# Altium PCB mini_backplane.PcbDoc (part 1 of 3)
Units mil, origin at the board's own origin, x right, y up, seen from the top; angles counter-clockwise.
Board outline 11387.22 x 6068.2 mil, 4 copper layers (Top Layer, POWER, GND, Bottom Layer); 147 components, 166 nets, 1018 pads, 501 vias.
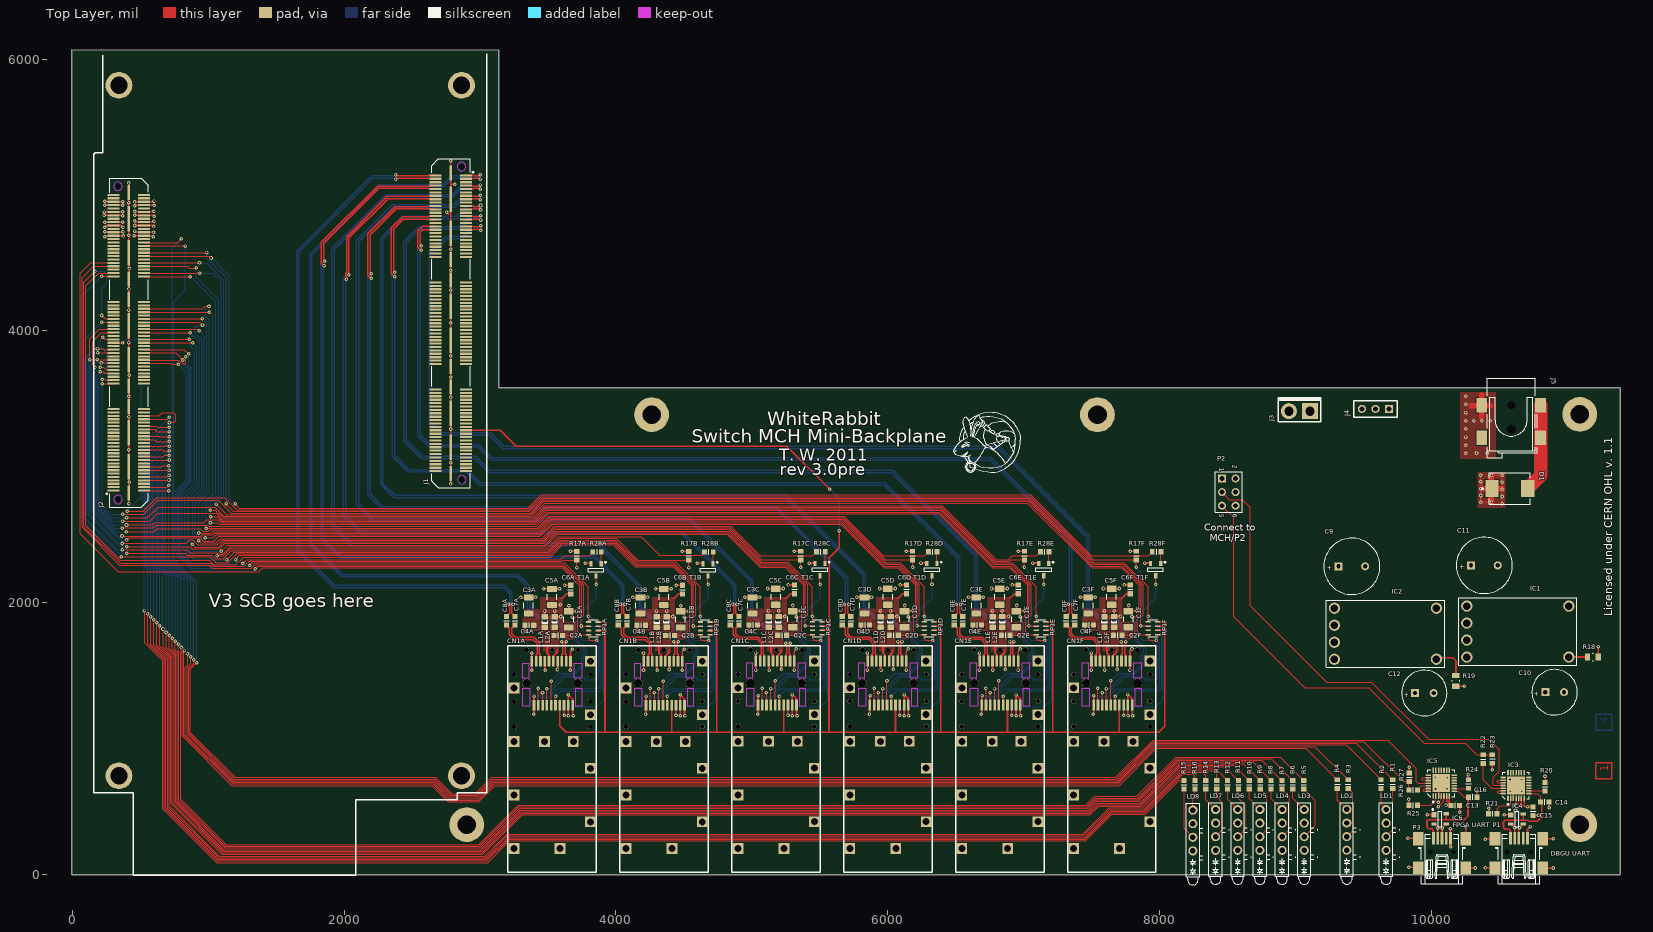
[diagram p0: Top Layer view]
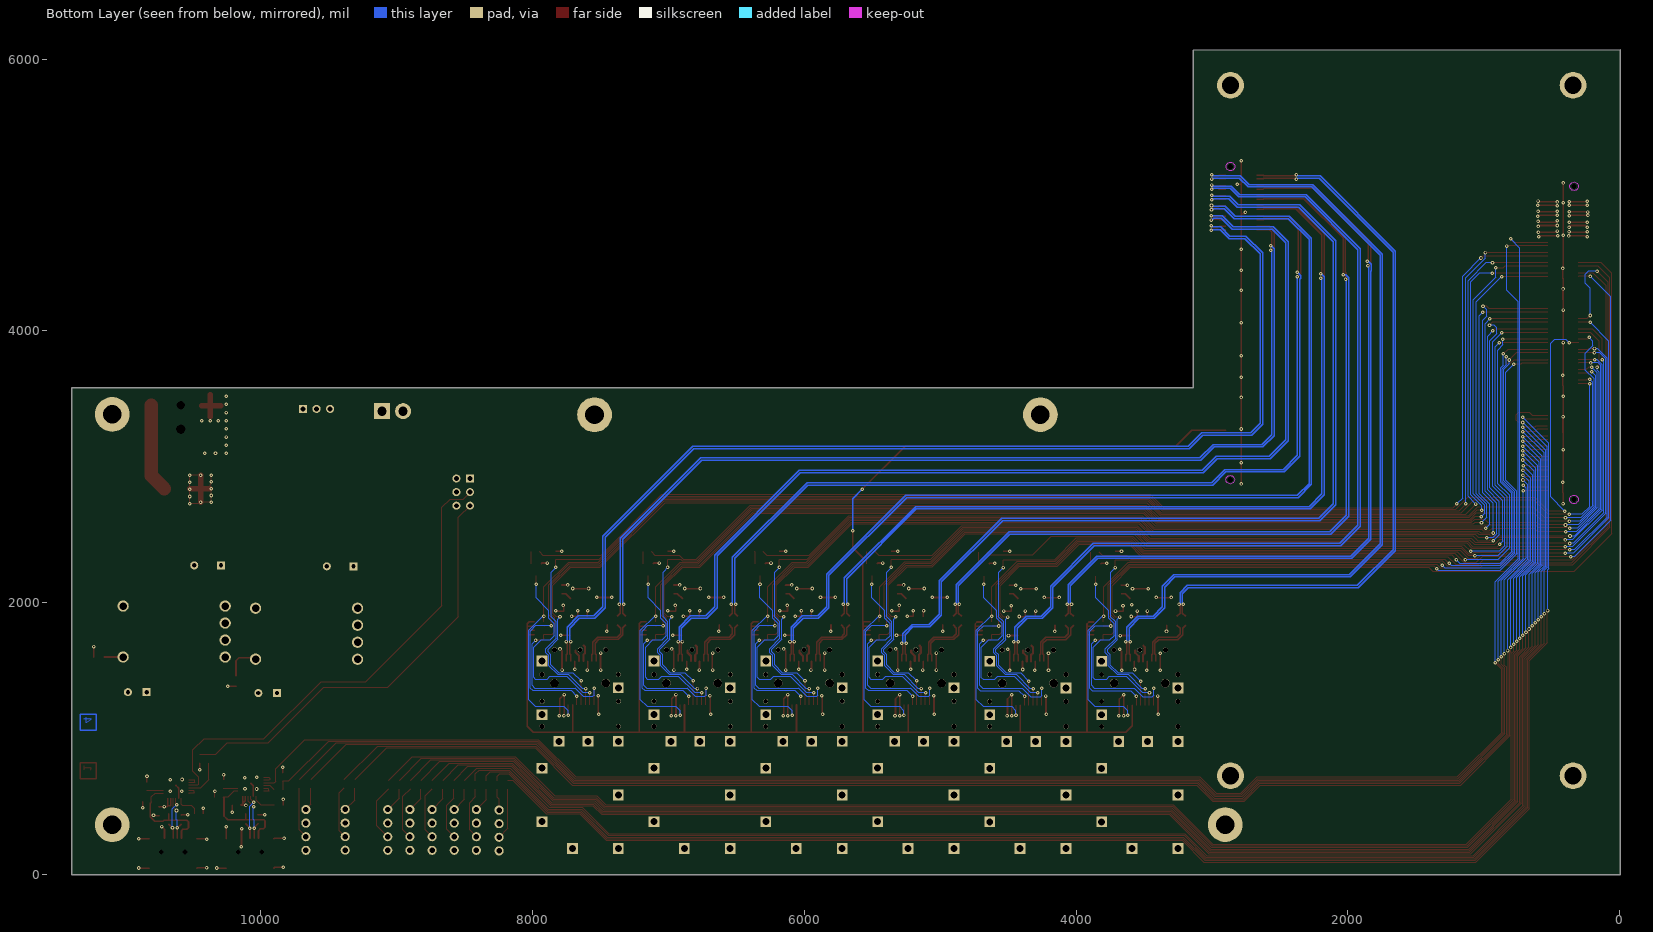
[diagram p1: Bottom Layer view, seen from below]
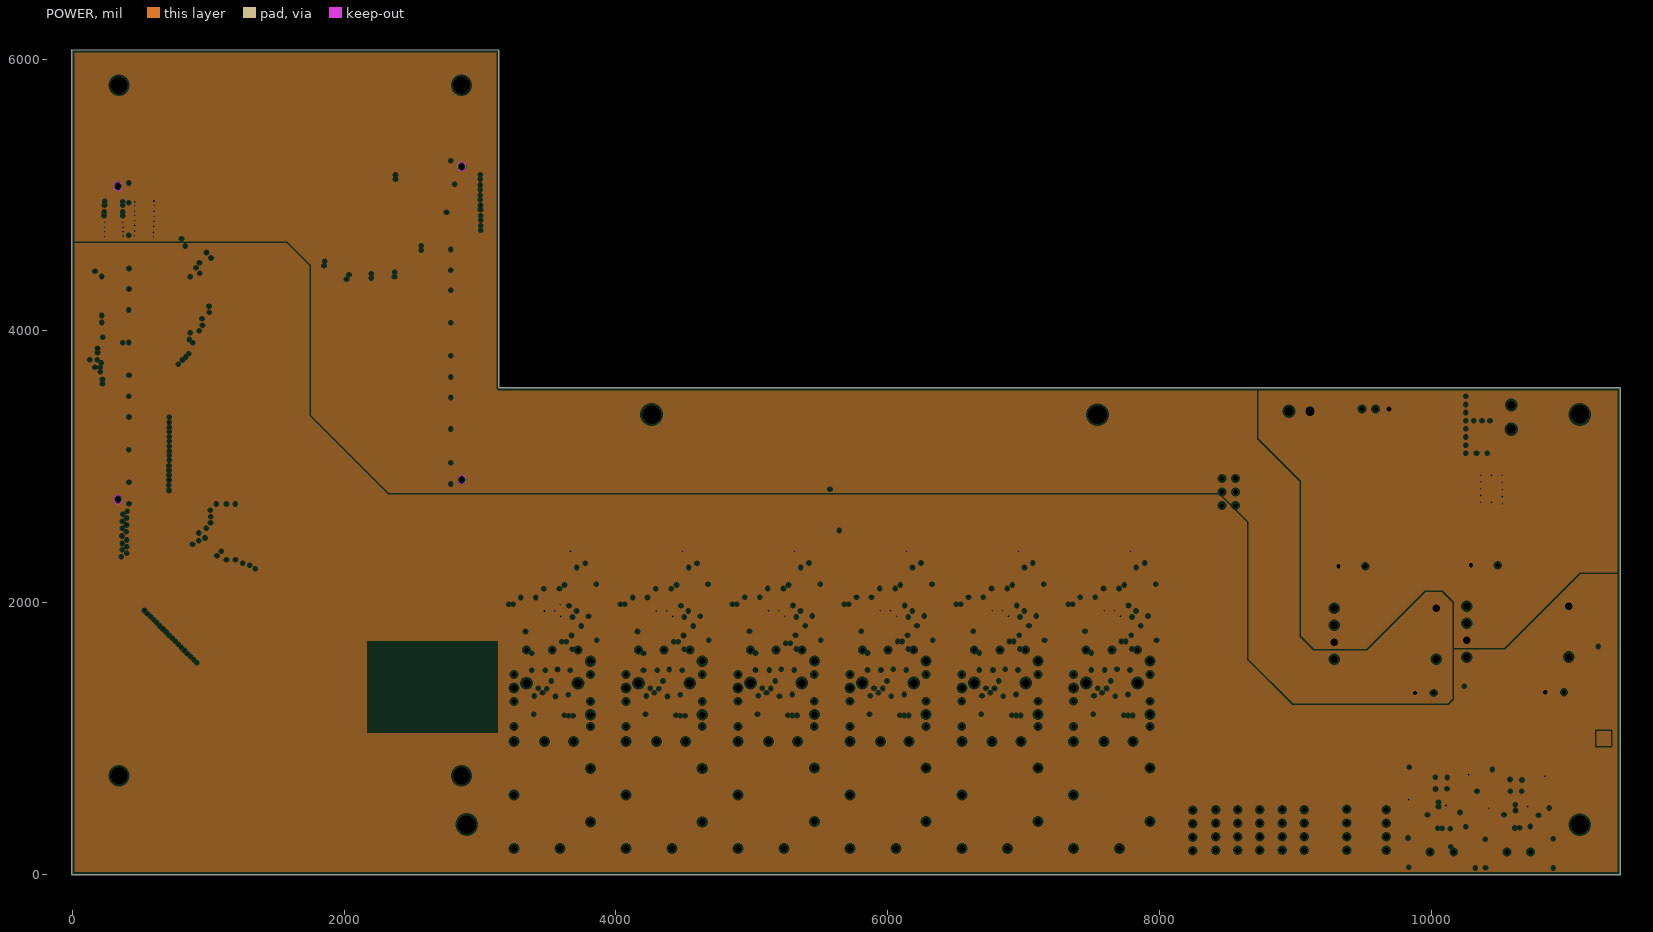
[diagram p2: POWER, clearances drawn from the general rule]
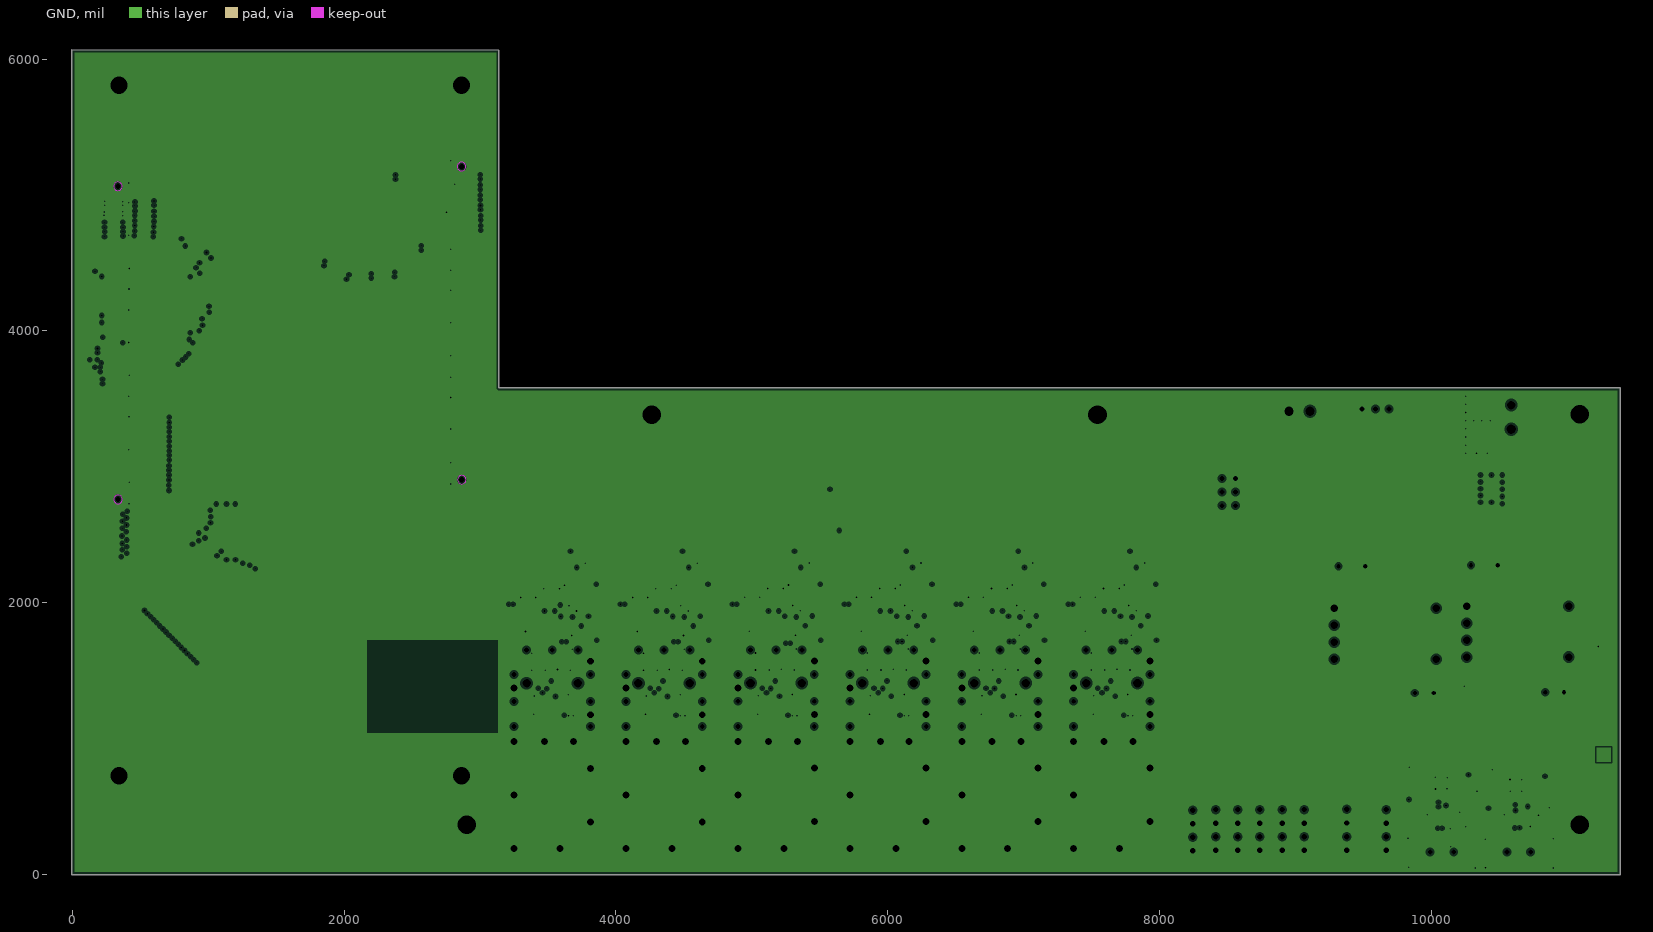
[diagram p3: GND, clearances drawn from the general rule]
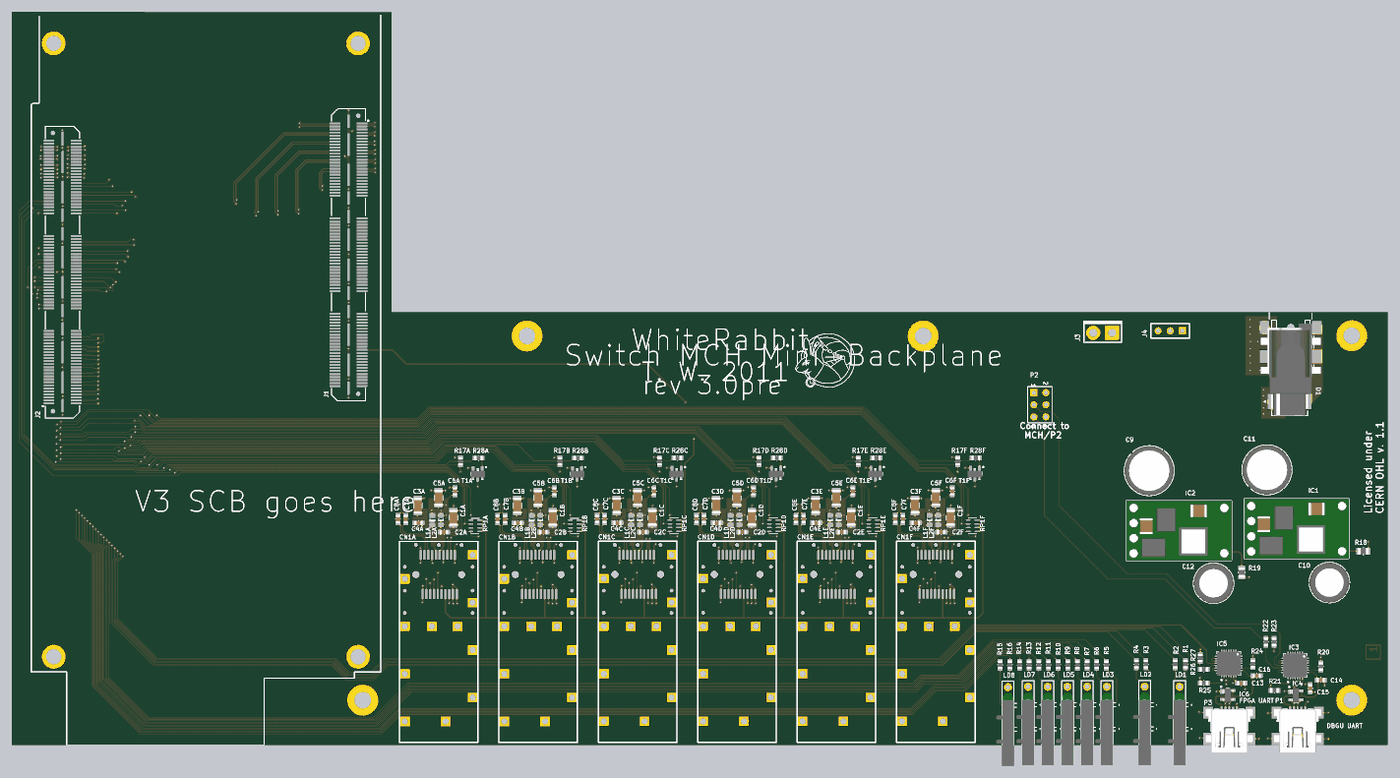
[diagram p6: 3D render of the assembled board from above, using the file's embedded part models]

## Layer stack, top to bottom
Top Layer: signal copper 1.4
Dielectric: core 12.6, FR-4, Dk 4.8
POWER: plane copper 1.4, net (Multiple Nets)
Dielectric: prepreg 12.6, FR-4, Dk 4.8
GND: plane copper 1.4, net GND
Dielectric: core 12.6, FR-4, Dk 4.8
Bottom Layer: signal copper 1.4

## Board outline
-1.22,-0.94 -1.22,6067.26 3140,6066.4 3140,3581 11386,3581 11386,-0.94

## Design rules (kind name [scope] priority, off if disabled: settings)
Clearance [All] p1: gap=6
DiffPairsRouting [All] p1: maxlimit=10 minlimit=6 mostfreqgap=10 toplayer_maxgap=6 toplayer_prefgap=6 bottomlayer_maxgap=6 bottomlayer_prefgap=6 maxuncoupledlength=500
HoleSize [All] p1: absolutevalues=TRUE maxlimit=300 minlimit=10 maxpercent=80.000 minpercent=20.000
MinimumAnnularRing [InAnyNet] p1: minimumring=7
MinimumSolderMaskSliver [All] p1: minsoldermaskwidth=2
PlaneClearance [All] p1: clearance=15
PlaneConnect [All] p1: planeconnectstyle=Direct reliefexpansion=20 reliefentries=4 reliefconductorwidth=10 reliefairgap=10
PolygonConnect PolygonConnect_via [All vs isvia] p1: connectstyle=Direct reliefconductorwidth=10 reliefentries=4 polygonreliefangle="90 Angle"
PolygonConnect [All] p2: connectstyle=Relief reliefconductorwidth=16 reliefentries=4 polygonreliefangle="90 Angle"
RoomDefinition U_scb_connectors [InComponentClass('U_scb_connectors')] p1: confinementstyle=ConfineIn formatcopy=TRUE lockcomponents=FALSE outline 120,2423 3096,2423 3096,5536 120,5536
RoomDefinition mini_backplane [InComponentClass('mini_backplane')] p2: confinementstyle=ConfineIn formatcopy=TRUE lockcomponents=FALSE outline 8018,2652 8293,2652 8293,3545 8018,3545
RoomDefinition U_sfp_wrapper1 [InComponentClass('U_sfp_wrapper1')] p3: confinementstyle=ConfineIn formatcopy=TRUE lockcomponents=FALSE outline 3125,-1 3948,-1 3948,2484 3125,2484
RoomDefinition U_usb_uart [InComponentClass('U_usb_uart')] p4: confinementstyle=ConfineIn formatcopy=TRUE lockcomponents=FALSE outline 9805,-121 11066,-121 11066,1073 9805,1073
RoomDefinition U_sfp_wrapper6 [InComponentClass('U_sfp_wrapper6')] p5: confinementstyle=ConfineIn formatcopy=TRUE lockcomponents=FALSE outline 7241,0 8064,0 8064,2485 7241,2485
RoomDefinition U_sfp_wrapper5 [InComponentClass('U_sfp_wrapper5')] p6: confinementstyle=ConfineIn formatcopy=TRUE lockcomponents=FALSE outline 6418,0 7241,0 7241,2485 6418,2485
RoomDefinition U_sfp_wrapper4 [InComponentClass('U_sfp_wrapper4')] p7: confinementstyle=ConfineIn formatcopy=TRUE lockcomponents=FALSE outline 5595,0 6418,0 6418,2485 5595,2485
RoomDefinition U_sfp_wrapper3 [InComponentClass('U_sfp_wrapper3')] p8: confinementstyle=ConfineIn formatcopy=TRUE lockcomponents=FALSE outline 4772,0 5595,0 5595,2485 4772,2485
RoomDefinition U_sfp_wrapper2 [InComponentClass('U_sfp_wrapper2')] p9: confinementstyle=ConfineIn formatcopy=TRUE lockcomponents=FALSE outline 3948,-1 4771,-1 4771,2484 3948,2484
RoomDefinition U_power_supply [InComponentClass('U_power_supply')] p10: confinementstyle=ConfineIn formatcopy=TRUE lockcomponents=FALSE outline 8709,3724 11340,3724 11340,1141 8709,1141
RoutingVias [All] p1: holewidth=12 width=26 viastyle="Through Hole" minholewidth=12 minwidth=24 maxholewidth=100 maxwidth=100
SilkscreenOverComponentPads [All] p1: minsilkscreentomaskgap=10
SolderMaskExpansion [All] p1: expansion=4
TestPointUsage [All] p1: valid=0 allowmultiple=FALSE
Testpoint [All] p1: side=15 testpointundercomponent=TRUE minsize=40 maxsize=100 preferedsize=60 minholesize=0 maxholesize=40 preferedholesize=32 testpointgrid=1 style=1023 order=0-112345678
Width Width_DIFF [(InDifferentialPairClass('All Differential Pairs'))] p1: maxlimit=11 minlimit=6 preferedwidth=10 toplayer_minwidth=11 toplayer_prefwidth=11 bottomlayer_minwidth=11 bottomlayer_prefwidth=11 minimp=50.000000 maximp=50.000000 favimp=50.000000
Width [All] p2: maxlimit=100 minlimit=6 preferedwidth=6
18 further rules are at their usual default settings.

## Classes and differential pairs
component class U_usb_uart: C13 C14 C15 C16 IC3 IC4 IC5 IC6 P1 P2 P3 R20 R21 R22 R23 R24 R25 R26 R27
component class U_sfp_wrapper6: C1F C2F C3F C4F C5F C6F C7F C8F CN1F L1F L2F R17F R28F RP1F T1F
component class U_sfp_wrapper5: C1E C2E C3E C4E C5E C6E C7E C8E CN1E L1E L2E R17E R28E RP1E T1E
component class U_sfp_wrapper4: C1D C2D C3D C4D C5D C6D C7D C8D CN1D L1D L2D R17D R28D RP1D T1D
component class U_sfp_wrapper3: C1C C2C C3C C4C C5C C6C C7C C8C CN1C L1C L2C R17C R28C RP1C T1C
component class U_sfp_wrapper2: C1B C2B C3B C4B C5B C6B C7B C8B CN1B L1B L2B R17B R28B RP1B T1B
component class U_sfp_wrapper1: C1A C2A C3A C4A C5A C6A C7A C8A CN1A L1A L2A R17A R28A RP1A T1A
component class U_scb_connectors: J1 J2
component class U_power_supply: C1 C2 C3 C4 C9 C10 C11 C12 C88 C89 CN2 CN3 D1 IC1 IC2 IC12 J3 J4 J5 Q1 Q2 Q3 R18 R19
channel class sfp_wrapper: SFP_DP0 SFP_DP1 SFP_DP2 SFP_DP3 SFP_DP4 SFP_DP5 SFP_DP6 SFP_DP7
component class mini_backplane: C46 C48 C76 C77 C78 C90 C? CN1 IC7 IC13 LD1 LD2 LD3 LD4 LD5 LD6 LD7 LD8 R1 R2 R3 R4 R5 R6 R7 R8 R9 R10 R11 R12 R13 R14 R15 R16
differential pair TD_INF: +TD_INF_P -TD_INF_N
differential pair TD_INE: +TD_INE_P -TD_INE_N
differential pair TD_IND: +TD_IND_P -TD_IND_N
differential pair TD_INC: +TD_INC_P -TD_INC_N
differential pair TD_INB: +TD_INB_P -TD_INB_N
differential pair TD_INA: +TD_INA_P -TD_INA_N
differential pair MGTTX113_1: +MGTTX113_1_P -MGTTX113_1_N
differential pair MGTTX113_0: +MGTTX113_0_P -MGTTX113_0_N
differential pair MGTTX112_3: +MGTTX112_3_P -MGTTX112_3_N
differential pair MGTTX112_2: +MGTTX112_2_P -MGTTX112_2_N
differential pair MGTTX112_1: +MGTTX112_1_P -MGTTX112_1_N
differential pair MGTTX112_0: +MGTTX112_0_P -MGTTX112_0_N
differential pair MGTRX113_1: +MGTRX113_1_P -MGTRX113_1_N
differential pair MGTRX113_0: +MGTRX113_0_P -MGTRX113_0_N
differential pair MGTRX112_3: +MGTRX112_3_P -MGTRX112_3_N
differential pair MGTRX112_2: +MGTRX112_2_P -MGTRX112_2_N
differential pair MGTRX112_1: +MGTRX112_1_P -MGTRX112_1_N
differential pair MGTRX112_0: +MGTRX112_0_P -MGTRX112_0_N

## Components (designator, comment, footprint, x,y, rotation, side; value= is the part's Value field where it differs from the comment)
C1A "10u/6.3V X7R" CAPC3216X140N 3653,1879 r90 top (schematic designator C1)
C1B "10u/6.3V X7R" CAPC3216X140N 4476,1879 r90 top (schematic designator C1)
C1C "10u/6.3V X7R" CAPC3216X140N 5300,1880 r90 top (schematic designator C1)
C1D "10u/6.3V X7R" CAPC3216X140N 6123,1880 r90 top (schematic designator C1)
C1E "10u/6.3V X7R" CAPC3216X140N 6946,1880 r90 top (schematic designator C1)
C1F "10u/6.3V X7R" CAPC3216X140N 7769,1880 r90 top (schematic designator C1)
C2A "100n" CAPC1608X87N 3575,1760 r0 top (schematic designator C2)
C2B "100n" CAPC1608X87N 4398,1760 r0 top (schematic designator C2)
C2C "100n" CAPC1608X87N 5222,1761 r0 top (schematic designator C2)
C2D "100n" CAPC1608X87N 6045,1761 r0 top (schematic designator C2)
C2E "100n" CAPC1608X87N 6868,1761 r0 top (schematic designator C2)
C2F "100n" CAPC1608X87N 7691,1761 r0 top (schematic designator C2)
C3A "10u/6.3V X7R" CAPC3216X140N 3358,1980 r270 top (schematic designator C3)
C3B "10u/6.3V X7R" CAPC3216X140N 4181,1980 r270 top (schematic designator C3)
C3C "10u/6.3V X7R" CAPC3216X140N 5005,1981 r270 top (schematic designator C3)
C3D "10u/6.3V X7R" CAPC3216X140N 5828,1981 r270 top (schematic designator C3)
C3E "10u/6.3V X7R" CAPC3216X140N 6651,1981 r270 top (schematic designator C3)
C3F "10u/6.3V X7R" CAPC3216X140N 7474,1981 r270 top (schematic designator C3)
C4A "100n" CAPC1608X87N 3364,1836 r0 top (schematic designator C4)
C4B "100n" CAPC1608X87N 4187,1836 r0 top (schematic designator C4)
C4C "100n" CAPC1608X87N 5011,1837 r0 top (schematic designator C4)
C4D "100n" CAPC1608X87N 5834,1837 r0 top (schematic designator C4)
C4E "100n" CAPC1608X87N 6657,1837 r0 top (schematic designator C4)
C4F "100n" CAPC1608X87N 7480,1837 r0 top (schematic designator C4)
C5A "10u/6.3V X7R" CAPC3216X140N 3530,2044 r270 top (schematic designator C5)
C5B "10u/6.3V X7R" CAPC3216X140N 4353,2044 r270 top (schematic designator C5)
C5C "10u/6.3V X7R" CAPC3216X140N 5177,2045 r270 top (schematic designator C5)
C5D "10u/6.3V X7R" CAPC3216X140N 6000,2045 r270 top (schematic designator C5)
C5E "10u/6.3V X7R" CAPC3216X140N 6823,2045 r270 top (schematic designator C5)
C5F "10u/6.3V X7R" CAPC3216X140N 7646,2045 r270 top (schematic designator C5)
C6A "100n" CAPC1608X87N 3667,2098 r270 top (schematic designator C6)
C6B "100n" CAPC1608X87N 4490,2098 r270 top (schematic designator C6)
C6C "100n" CAPC1608X87N 5314,2099 r270 top (schematic designator C6)
C6D "100n" CAPC1608X87N 6137,2099 r270 top (schematic designator C6)
C6E "100n" CAPC1608X87N 6960,2099 r270 top (schematic designator C6)
C6F "100n" CAPC1608X87N 7783,2099 r270 top (schematic designator C6)
C7A "10n" CAPC1608X87N 3258.18,1868.58 r270 top (schematic designator C7)
C7B "10n" CAPC1608X87N 4081.18,1868.58 r270 top (schematic designator C7)
C7C "10n" CAPC1608X87N 4905.18,1869.58 r270 top (schematic designator C7)
C7D "10n" CAPC1608X87N 5728.18,1869.58 r270 top (schematic designator C7)
C7E "10n" CAPC1608X87N 6551.18,1869.58 r270 top (schematic designator C7)
C7F "10n" CAPC1608X87N 7374.18,1869.58 r270 top (schematic designator C7)
C8A "10n" CAPC1608X87N 3195.18,1868.58 r270 top (schematic designator C8)
C8B "10n" CAPC1608X87N 4018.18,1868.58 r270 top (schematic designator C8)
C8C "10n" CAPC1608X87N 4842.18,1869.58 r270 top (schematic designator C8)
C8D "10n" CAPC1608X87N 5665.18,1869.58 r270 top (schematic designator C8)
C8E "10n" CAPC1608X87N 6488.18,1869.58 r270 top (schematic designator C8)
C8F "10n" CAPC1608X87N 7311.18,1869.58 r270 top (schematic designator C8)
C9 "150uF" CAPPR500-1050X800 9413,2269 r0 top
C10 "150uF" CAPPR350-850X700 10905,1343 r0 top
C11 "150uF" CAPPR500-1050X800 10388,2276 r0 top
C12 "150uF" CAPPR350-850X700 9946,1337 r0 top
C13 "1uF" CAPC1608X87N 10175,510 r0 top
C14 "100nF" CAPC1608X87N 10833,536 r0 top
C15 "1uF" CAPC1608X87N 10746,467 r270 top
C16 "100nF" CAPC1608X87N 10303,571 r0 top
CN1A "SFP Module socket" SFP_SINGLE_PORT 3251,1374 r0 top (schematic designator CN1)
CN1B "SFP Module socket" SFP_SINGLE_PORT 4074,1374 r0 top (schematic designator CN1)
CN1C "SFP Module socket" SFP_SINGLE_PORT 4898,1375 r0 top (schematic designator CN1)
CN1D "SFP Module socket" SFP_SINGLE_PORT 5721,1375 r0 top (schematic designator CN1)
CN1E "SFP Module socket" SFP_SINGLE_PORT 6544,1375 r0 top (schematic designator CN1)
CN1F "SFP Module socket" SFP_SINGLE_PORT 7367,1375 r0 top (schematic designator CN1)
D1 "SS34" DIOM7659X265N 10575,2841 r0 top
IC1 "PTH12050WAH" "TEXAS_EUU (R-PDSS-T6)" 10634,1789 r0 top
IC2 "PTH12050WAH" "TEXAS_EUU (R-PDSS-T6)" 9660,1773 r0 top
IC3 "CP2102-GM" QFN50P500X500X100-29N-S335 10621,657 r90 top
IC4 "PRTR5V0U2X" SOT190P230X110-4N 10628,410 r0 top
IC5 "CP2102-GM" QFN50P500X500X100-29N-S335 10071,674 r90 top
IC6 "PRTR5V0U2X" SOT190P230X110-4N 10063,412 r0 top
J1 "QTS-075-01-L-D-A_WRMOD" QTS-075-01-L-D-A_WRMOD 2785.43,4057.09 r270 top locked
J2 "QTS-075-01-L-D-A_WRMOD" QTS-075-01-L-D-A_WRMOD 417.32,3913.39 r90 top locked
J3 "Power" CON_3.96_2 9106,3410 r180 top
J4 "FAN" SIP3 9687,3427 r90 top
J5 "Jack" LUMBERG_161314 10585,3278 r270 top
L1A "Inductor" INDC2012-0805 3478,1859 r90 top (schematic designator L1)
L1B "Inductor" INDC2012-0805 4301,1859 r90 top (schematic designator L1)
L1C "Inductor" INDC2012-0805 5125,1860 r90 top (schematic designator L1)
L1D "Inductor" INDC2012-0805 5948,1860 r90 top (schematic designator L1)
L1E "Inductor" INDC2012-0805 6771,1860 r90 top (schematic designator L1)
L1F "Inductor" INDC2012-0805 7594,1860 r90 top (schematic designator L1)
L2A "Inductor" INDC2012-0805 3550,1860 r90 top (schematic designator L2)
L2B "Inductor" INDC2012-0805 4373,1860 r90 top (schematic designator L2)
L2C "Inductor" INDC2012-0805 5197,1861 r90 top (schematic designator L2)
L2D "Inductor" INDC2012-0805 6020,1861 r90 top (schematic designator L2)
L2E "Inductor" INDC2012-0805 6843,1861 r90 top (schematic designator L2)
L2F "Inductor" INDC2012-0805 7666,1861 r90 top (schematic designator L2)
LD1 "Red/Green" LED_DIALIGHT_571-0112-100F 9665,180 r90 top
LD2 "Red/Green" LED_DIALIGHT_571-0112-100F 9376,181 r90 top
LD3 "Red/Green" LED_DIALIGHT_571-0112-100F 9063,180 r90 top
LD4 "Red/Green" LED_DIALIGHT_571-0112-100F 8899.99,180 r90 top
LD5 "Red/Green" LED_DIALIGHT_571-0112-100F 8736.97,180 r90 top
LD6 "Red/Green" LED_DIALIGHT_571-0112-100F 8573.96,180 r90 top
LD7 "Red/Green" LED_DIALIGHT_571-0112-100F 8410.95,180 r90 top
LD8 "Red/Green" LED_DIALIGHT_571-0112-100F 8244,176.06 r90 top
P1 "DBGU UART" TYCO_1734035-1 10642,269 r0 top
P2 "SCB DBGU" HDR2X3 8458,2915 r270 top
P3 "FPGA UART" TYCO_1734035-1 10076,269 r0 top
R1 "330" RESC1608X55N 9714,667 r270 top
R2 "330" RESC1608X55N 9628,667 r270 top
R3 "330" RESC1608X55N 9386,667 r270 top
R4 "330" RESC1608X55N 9307,667 r270 top
R5 "330" RESC1608X55N 9059,662 r270 top
R6 "330" RESC1608X55N 8979,662 r270 top
R7 "330" RESC1608X55N 8899,662 r270 top
R8 "330" RESC1608X55N 8819,662 r270 top
R9 "330" RESC1608X55N 8739,662 r270 top
R10 "330" RESC1608X55N 8659,662 r270 top
R11 "330" RESC1608X55N 8579,662 r270 top
R12 "330" RESC1608X55N 8499,662 r270 top
R13 "330" RESC1608X55N 8419,662 r270 top
R14 "330" RESC1608X55N 8339,662 r270 top
R15 "330" RESC1608X55N 8179,662 r270 top
R16 "330" RESC1608X55N 8259,662 r270 top
R17A "10k" RESC1608X55N 3712,2347 r90 top (schematic designator R17)
R17B "10k" RESC1608X55N 4535,2347 r90 top (schematic designator R17)
R17C "10k" RESC1608X55N 5359,2348 r90 top (schematic designator R17)
R17D "10k" RESC1608X55N 6182,2348 r90 top (schematic designator R17)
R17E "10k" RESC1608X55N 7005,2348 r90 top (schematic designator R17)
R17F "10k" RESC1608X55N 7828,2348 r90 top (schematic designator R17)
R18 "2k" RESC2012X60N 11186,1602 r180 top
R19 "270" RESC2012X60N 10179,1426 r90 top
R20 "3k3" RESC1608X55N 10834,648 r90 top
R21 "3k3" RESC1608X55N 10450,449 r0 top
R22 "3k3" RESC1608X55N 10380,851 r270 top
R23 "10k" RESC1608X55N 10447,852 r270 top
R24 "3k3" RESC1608X55N 10271,668 r90 top
R25 "3k3" RESC1608X55N 9865,511 r0 top
R26 "3k3" RESC1608X55N 9865,624 r0 top
R27 "10k" RESC1608X55N 9836,718 r90 top
R28A "10k" RESC1608X55N 3861,2374 r0 top (schematic designator R28)
R28B "10k" RESC1608X55N 4684,2374 r0 top (schematic designator R28)
R28C "10k" RESC1608X55N 5508,2375 r0 top (schematic designator R28)
R28D "10k" RESC1608X55N 6331,2375 r0 top (schematic designator R28)
R28E "10k" RESC1608X55N 7154,2375 r0 top (schematic designator R28)
R28F "10k" RESC1608X55N 7977,2375 r0 top (schematic designator R28)
RP1A "10k" CAY-16 3869,1765 r180 top (schematic designator RP1)
RP1B "10k" CAY-16 4692,1765 r180 top (schematic designator RP1)
RP1C "10k" CAY-16 5516,1766 r180 top (schematic designator RP1)
RP1D "10k" CAY-16 6339,1766 r180 top (schematic designator RP1)
RP1E "10k" CAY-16 7162,1766 r180 top (schematic designator RP1)
RP1F "10k" CAY-16 7985,1766 r180 top (schematic designator RP1)
T1A "BC847B" SOT95P230X110-3N 3854,2243 r270 top (schematic designator T1)
T1B "BC847B" SOT95P230X110-3N 4677,2243 r270 top (schematic designator T1)
T1C "BC847B" SOT95P230X110-3N 5501,2244 r270 top (schematic designator T1)
T1D "BC847B" SOT95P230X110-3N 6324,2244 r270 top (schematic designator T1)
T1E "BC847B" SOT95P230X110-3N 7147,2244 r270 top (schematic designator T1)
T1F "BC847B" SOT95P230X110-3N 7970,2244 r270 top (schematic designator T1)

## Footprints (in the part's own frame and the unit in brackets; to place one, negate y for a bottom-side part, rotate by r counter-clockwise, add the part's x,y. Pads: shape width x height; smd on the part's side, far side on the other; paste and mask are expansions set on the pad)
CAPC1608X87N [mm] "Chip Capacitor, Body 1.6x0.8mm IPC Medium Density"
  rect 0.95x1 smd: 1(-0.8,0) 2(0.8,0)
  silkscreen extent 0,-0.5 0,0.5, body extent -0.87,-0.47 0.88,0.48, height 0.87
CAPC3216X140N [mm] "Chip Capacitor, Body 3.2x1.6mm, IPC Medium Density"
  rect 1.15x1.8 smd: 1(-1.5,0) 2(1.5,0)
  silkscreen extent -0.5,-0.9 0.5,0.9, body extent -1.7,-0.9 1.7,0.9, height 1.4
CAPPR350-850X700 [mm] "Capacitor, Radial, Pin spacing 3.5mm - Body Diameter 8.5mm x Body Height 7.0mm"
  rect 1.5x1.5 hole 0.8: 1(-1.75,0)
  round 1.5 hole 0.8: 2(1.75,0)
  silkscreen extent -4.25,-4.25 4.25,4.25, body extent -4.25,-4.25 4.25,4.24, height 7
CAPPR500-1050X800 [mm] "Capacitor, Radial, Pin spacing 5.0mm - Body Diameter 10.0mm X Body Height 8mm"
  rect 1.5x1.5 hole 0.8: 1(-2.5,0)
  round 1.5 hole 0.8: 2(2.5,0)
  silkscreen extent -5.25,-5.25 5.25,5.25, body extent -5.25,-5.23 5.25,5.23, height 8
CAY-16 [mil]
  oval 40x12 smd: 1(0,0) 2(0,-31.5) 3(0,-62.99) 4(0,-94.49) 5(70,-94.49) 6(70,-62.99) 7(70,-31.5) 8(70,0)
  silkscreen extent 0,-110 70,15
CON_3.96_2 [mm]
  rect 3x3 hole 1.7: 1(0,0)
  round 3 hole 1.7: 2(3.96,0)
  silkscreen extent -1.98,-2.5 5.94,1.98
DIOM7659X265N [mm] "DO-214-AB/SMC Molded Diode, Body 7.95x5.9mm, IPC Medium Density"
  rect 2.45x3.2 smd: 1(-3.35,0) 2(3.35,0)
  silkscreen extent -5.22,-2.95 3.8,2.95, body extent -3.97,-2.95 3.98,2.95, height 2.65
HDR2X3 [mm] "Connector; Header; 3x2 Position"
  rect 1.5x1.5 hole 0.9: 1(0,0)
  round 1.5 hole 0.9: 2(0,2.54) 3(2.54,0) 4(2.54,2.54) 5(5.08,0) 6(5.08,2.54)
  silkscreen extent -1.27,-1.27 6.35,3.81
INDC2012-0805 [mm] "Chip Inductor; Body 2 x 1.2 mm (LxW typ)"
  rect 1x1.2 smd: 1(-1,0) 2(1,0)
  silkscreen extent -0.2,-0.5 0.2,0.5
LED_DIALIGHT_571-0112-100F [mm] "2x 2mm LED (Top: Red, Bot: Green) PCB Edge Mounting (With positioning pins) DIALIGHT 571 Serie"
  round 1.7 hole 1: 1(0,0) 2(2.54,0) 3(5.08,0) 4(7.62,0)
  silkscreen extent -6.35,-2.52 8.89,1.25, body extent -6.35,-2.52 8.89,1.25, height 8.6
LUMBERG_161314 [mm] "Right Angle Surface Mount Power Supply Chassis Socket With Break Contacts"
  rect 2.7x2 smd: 1(-4.5,-5.5) 2(1.6,-5.5) 3(-4.5,5.5) 3(1.6,5.5)
  round 1 hole 1.6 unplated mask+0.3: 4(-4.5,0)
  round 1 hole 1.8 unplated mask+0.4: 4(0,0)
  silkscreen extent -9.5,-4.5 5.3,4.9, body extent -9.5,-6.3 5.3,6.3, height 11
QFN50P500X500X100-29N-S335 [mm] "QFN, 0.50mm Pitch, Square; 28 pin, 5.00mm L X 5.00mm W X 1.00mm H body (w/thermal tab 3.35 X 3.35mm),  IPC Medium Density"
  oval 1.05x0.3 smd: 1(-2.4,1.5) 2(-2.4,1) 3(-2.4,0.5) 4(-2.4,0) 5(-2.4,-0.5) 6(-2.4,-1) 7(-2.4,-1.5) 15(2.4,-1.5) 16(2.4,-1) 17(2.4,-0.5) 18(2.4,0) 19(2.4,0.5) 20(2.4,1) 21(2.4,1.5)
  oval 0.3x1.05 smd: 8(-1.5,-2.4) 9(-1,-2.4) 10(-0.5,-2.4) 11(0,-2.4) 12(0.5,-2.4) 13(1,-2.4) 14(1.5,-2.4) 22(1.5,2.4) 23(1,2.4) 24(0.5,2.4) 25(0,2.4) 26(-0.5,2.4) 27(-1,2.4) 28(-1.5,2.4)
  rect 3.35x3.35 smd: 29(0,0)
  silkscreen extent -3.62,-2.5 2.5,2.5, body extent -2.5,-2.5 2.5,2.5, height 1
QTS-075-01-L-D-A_WRMOD [mm] "0.635mm pitch, high speed socket (adapted to use in mini-backplane due to lack of differential version)"
  rect 0.4x2.25 smd mask+0: 1(-27.62,2.865) 2(-27.62,-2.865) 3(-26.98,2.865) 4(-26.98,-2.865) 5(-25.716,2.865) 6(-25.716,-2.865) 7(-25.076,2.865) 8(-25.076,-2.865) 9(-23.812,2.865) 10(-23.812,-2.865) 11(-23.172,2.865) 12(-23.172,-2.865) 13(-21.908,2.865) 14(-21.908,-2.865) 15(-21.268,2.865) 16(-21.268,-2.865) 17(-20.004,2.865) 18(-20.004,-2.865) 19(-19.364,2.865) 20(-19.364,-2.865) 21(-18.1,2.865) 22(-18.1,-2.865) 23(-17.46,2.865) 24(-17.46,-2.865) 25(-16.196,2.865) 26(-16.196,-2.865) 27(-15.556,2.865) 28(-15.556,-2.865) 29(-14.292,2.865) 30(-14.292,-2.865) 31(-13.652,2.865) 32(-13.652,-2.865) 33(-7.62,2.865) 34(-7.62,-2.865) 35(-6.98,2.865) 36(-6.98,-2.865) 37(-5.716,2.865) 38(-5.716,-2.865) 39(-5.076,2.865) 40(-5.076,-2.865) 41(-3.812,2.865) 42(-3.812,-2.865) 43(-3.172,2.865) 44(-3.172,-2.865) 45(-1.908,2.865) 46(-1.908,-2.865) 47(-1.268,2.865) 48(-1.268,-2.865) 49(-0.004,2.865) 50(-0.004,-2.865) 51(0.636,2.865) 52(0.636,-2.865) 53(1.9,2.865) 54(1.9,-2.865) 55(2.54,2.865) 56(2.54,-2.865) 57(3.804,2.865) 58(3.804,-2.865) 59(4.444,2.865) 60(4.444,-2.865) 61(5.708,2.865) 62(5.708,-2.865) 63(6.348,2.865) 64(6.348,-2.865) 65(12.38,2.865) 66(12.38,-2.865) 67(13.02,2.865) 68(13.02,-2.865) 69(14.284,2.865) 70(14.284,-2.865) 71(14.924,2.865) 72(14.924,-2.865) 73(16.188,2.865) 74(16.188,-2.865) 75(16.828,2.865) 76(16.828,-2.865) 77(18.092,2.865) 78(18.092,-2.865) 79(18.732,2.865) 80(18.732,-2.865) 81(19.996,2.865) 82(19.996,-2.865) 83(20.636,2.865) 84(20.636,-2.865) 85(21.9,2.865) 86(21.9,-2.865) 87(22.54,2.865) 88(22.54,-2.865) 89(23.804,2.865) 90(23.804,-2.865) 91(24.444,2.865) 92(24.444,-2.865) 93(25.708,2.865) 94(25.708,-2.865) 95(26.348,2.865) 96(26.348,-2.865) X(-26.35,-2.85) X(-26.35,2.865) X(-24.445,-2.85) X(-24.445,2.865) X(-22.54,-2.85) X(-22.54,2.865) X(-20.635,-2.85) X(-20.635,2.865) X(-18.73,-2.85) X(-18.73,2.865) X(-16.825,-2.85) X(-16.825,2.865) X(-14.92,-2.85) X(-14.92,2.865) X(-13.015,-2.85) X(-13.015,2.865) X(-12.38,-2.85) X(-12.38,2.865) X(-6.348,2.865) X(-6.348,-2.85) X(-4.443,2.865) X(-4.443,-2.85) X(-2.538,2.865) X(-2.538,-2.85) X(-0.633,2.865) X(-0.633,-2.85) X(1.272,2.865) X(1.272,-2.85) X(3.177,2.865) X(3.177,-2.85) X(5.082,2.865) X(5.082,-2.85) X(6.987,-2.85) X(6.987,2.865) X(7.622,-2.85) X(7.622,2.865) X(13.655,-2.85) X(13.655,2.865) X(15.56,-2.85) X(15.56,2.865) X(17.465,-2.85) X(17.465,2.865) X(19.37,-2.85) X(19.37,2.865) X(21.275,-2.85) X(21.275,2.865) X(23.18,-2.85) X(23.18,2.865) X(25.085,-2.85) X(25.085,2.865) X(26.99,-2.85) X(26.99,2.865) X(27.625,-2.85) X(27.625,2.865)
  rect 2.8x0.45 smd mask+0: 97(-28.065,0) 100(-11.935,0) 101(-8.065,0) 104(8.065,0) 105(11.935,0) 108(28.065,0)
  rect 4.7x0.45 smd mask+0: 98(-23.175,0) 99(-16.825,0) 102(-3.175,0) 103(3.175,0) 106(16.825,0) 107(23.175,0)
  round 0.5 hole 1 unplated mask+0: 109(-29.25,2.03) 110(29.25,2.03)
  Keep-Out Layer pour cut-out: -28.447,2.011 -28.474,2.22 -28.555,2.415 -28.683,2.582 -28.85,2.71 -29.045,2.791 -29.253,2.818 -29.462,2.791 -29.657,2.71 -29.824,2.582 -29.952,2.415 -30.033,2.22 -30.06,2.011 -30.033,1.802 -29.952,1.608 -29.824,1.441 -29.657,1.312 -29.462,1.232 -29.253,1.204 -29.045,1.232 -28.85,1.312 -28.683,1.441 -28.555,1.608 -28.474,1.802
  Keep-Out Layer pour cut-out: 30.037,2.051 30.01,2.26 29.929,2.455 29.801,2.622 29.634,2.75 29.439,2.831 29.231,2.858 29.022,2.831 28.827,2.75 28.66,2.622 28.532,2.455 28.451,2.26 28.424,2.051 28.451,1.842 28.532,1.648 28.66,1.481 28.827,1.352 29.022,1.272 29.231,1.244 29.439,1.272 29.634,1.352 29.801,1.481 29.929,1.648 30.01,1.842
  silkscreen extent -30.7,-3.6 30.7,4.26
RESC1608X55N [mm] "Chip Resistor, EIA 0603, Metric 1608, Body 1.6x0.8mm, IPC Medium Density"
  rect 0.9x1 smd: 1(-0.8,0) 2(0.8,0)
  silkscreen extent 0,-0.5 0,0.5, body extent -0.87,-0.47 0.88,0.48, height 0.55
RESC2012X60N [mm] "Chip Resistor, EIA 0805, Metric 2012, Body 2.0x1.2mm, IPC Medium Density"
  rect 0.95x1.4 smd: 1(-1,0) 2(1,0)
  silkscreen extent -0.1,-0.7 0.1,0.7, body extent -1.1,-0.67 1.1,0.68, height 0.6
SFP_SINGLE_PORT [mm]
  rect 0.5x2 smd: 1(3.73,-3.2) 2(4.53,-3.2) 3(5.33,-3.2) 4(6.13,-3.2) 5(6.93,-3.2) 6(7.73,-3.2) 7(8.53,-3.2) 8(9.33,-3.2) 9(10.13,-3.2) 10(10.93,-3.2) 11(10.53,5) 12(9.73,5) 13(8.93,5) 14(8.13,5) 15(7.33,5) 16(6.53,5) 17(5.73,5) 18(4.93,5) 19(4.13,5) 20(3.33,5)
  rect 2x2 hole 1.3: 21(0,0) 22(14.25,5) 23(14.25,-5) 24(0,-10) 25(5.68,-10) 26(11.08,-10) 27(14.25,-15) 28(0,-20) 29(14.25,-25) 30(0,-30) 31(8.58,-30)
  round 0.9 hole 0.9 unplated: ""(0,-7.2) ""(0,-2.5) ""(0,2.5) ""(2.33,7.1) ""(7.13,7.1) ""(11.93,7.1) ""(14.25,-7.2) ""(14.25,-2.5) ""(14.25,2.5)
  round 1.6 hole 1.6 unplated: ""(2.33,0.9) ""(11.93,0.9)
  Top Layer pour cut-out: 1.016,6.858 3.556,6.858 3.556,7.874 5.461,7.874 5.461,6.858 8.382,6.858 8.382,7.874 10.287,7.874 10.287,6.858 13.208,6.858 13.208,-7.747 1.016,-7.747
  Top Layer keep-out region: 1.524,1.905 2.794,1.905 2.794,4.572 1.524,4.572
  Top Layer keep-out region: 1.524,-3.302 3.048,-3.302 3.048,-0.127 1.524,-0.127
  Top Layer keep-out region: 11.43,-3.302 12.7,-3.302 12.7,-0.127 11.43,-0.127
  Top Layer keep-out region: 11.176,1.905 12.7,1.905 12.7,4.572 11.176,4.572
  silkscreen extent -1.14,-34.42 15.37,7.87
SIP3 [mil]
  rect 60x60 hole 38: 1(0,0)
  round 60 hole 38: 2(0,100) 3(0,200)
  silkscreen extent -60,-60 60,260
SOT95P230X110-3N [mm] "SOT23, 3 pin, Pitch 0.95mm - 1.3mm W X 2.9mm L X 1.1mm H, IPC Medium Density"
  rect 1x0.6 smd: 1(-1.15,0.95) 2(-1.15,-0.95) 3(1.15,0)
  silkscreen extent -1.52,-1.45 0.33,1.88, body extent -1.17,-1.5 1.33,1.5, height 1.1
SOT190P230X110-4N [mm] "SOT143, SOT, 1.90mm Pitch; 4 Pin, 1.30mm W X 2.90mm L X 1.10mm H body, IPC Medium Density"
  rect 1x1 smd: 1(-1.15,0.75)
  rect 1x0.6 smd: 2(-1.15,-0.95) 3(1.15,-0.95) 4(1.15,0.95)
  silkscreen extent -1.52,-1.45 0.33,1.87, body extent -1.25,-1.5 1.25,1.5, height 1.1
"TEXAS_EUU (R-PDSS-T6)" [mm] "Texas TEXAS_EUU (R-PDSS-T6) Case"
  round 2.1 hole 1.4: 1(-9.53,4.77) 2(-9.53,1.59) 3(-9.53,-1.59) 4(-9.53,-4.77) 5(9.53,-4.75) 6(9.53,4.77)
  silkscreen extent -11.05,-6.29 11.05,6.29, body extent -11.05,-6.28 11.05,6.29, height 8.5
TYCO_1734035-1 [mm] "SMD, Right Angle, 5 Position, Type B, Mini USB Receptacle"
  rect 0.5x2.3 smd: 1(-1.575,0) 2(-0.8,0) 3(0,0) 4(0.8,0) 5(1.6,0)
  rect 2x2.5 smd: 6(-4.45,-5.6) 6(-4.45,-0.1) 6(4.45,-5.6) 6(4.45,-0.1)
  round 0.5 hole 0.9 unplated mask+0.2: MTG1(-2.2,-2.6) MTG2(2.2,-2.6)
  silkscreen extent -4.35,-8.5 4.35,0.7, body extent -4.95,-8.5 4.95,0.7, height 4.14

## Part data
C1A C1B C1C C1D C1E C1F C3A C3B C3C C3D C3E C3F C5A C5B C5C C5D C5E C5F: library part CC1206_10UF_10V_10%_X7R, "Non-polarised capacitor"
C2A C2B C2C C2D C2E C2F C4A C4B C4C C4D C4E C4F C6A C6B C6C C6D C6E C6F C14 C16: library part CC0603_100NF_50V_10%_X7R, "Non-polarised capacitor"
C7A C7B C7C C7D C7E C7F C8A C8B C8C C8D C8E C8F: library part CC0603_10NF_50V_10%_X7R, "Non-polarised capacitor"
C9 C11: library part CAER_150UF_16V_20%_SANYO_16SEQP150M, "Polarised capacitor"
C10 C12: library part CAER_150UF_6.3V_20%_SANYO_6SEQP150M, "Polarised capacitor"
C13 C15: library part CC0603_1UF_16V_10%_X7R, "Non-polarised capacitor"
CN1A CN1B CN1C CN1D CN1E CN1F: library part SFP_SOCKET_SINGLE, "Socket for SFP module"
D1: "Schottky Diode"
IC1 IC2: "6-A, 12-V Input, Non-Isolated, Wide-Output 1.2V to 5.5V, Adjustable Power Modue"
IC3 IC5: "Single-Chip USB to UART Bridge"
IC4 IC6: "Ultra Low Capacitance Double Rail-to-Rail ESD Protection Diode"
J1 J2: "High Speed Ground Plane Header"
J3: library part "Header 2", "Header, 2-Pin"
J4: library part CON3, "Connector"
J5: library part LUMBERG_161314, "24V /3. 5A, 2.1mm Diameter Pin, SMD DC Power Supply Connector With  Break Contact"
L1A L1B L1C L1D L1E L1F L2A L2B L2C L2D L2E L2F: "Ferrite bead"
LD1 LD2 LD3 LD4 LD5 LD6 LD7 LD8: library part LED_DIALIGHT_571-0112-100F, "2x LED  Botom Green, Top Red"
P1 P3: library part TYCO_1734035-1, "5 Pin + 1 Shield USB Receptacle"
P2: library part MHDR2X3, "Header, 3-Pin, Dual row, 2.54mm pitch"
R1 R2 R3 R4 R5 R6 R7 R8 R9 R10 R11 R12 R13 R14 R15 R16: library part R0603_330R_1%_0.1W_100PPM, "Resistor - 1%"
R17A R17B R17C R17D R17E R17F R23 R27 R28A R28B R28C R28D R28E R28F: library part R0603_10K_1%_0.1W_100PPM, "Resistor - 1%"
R18: library part R0805_2K_1%_0.125W_100PPM, "Resistor - 1%"
R19: library part R0805_270R_1%_0.125W_100PPM, "Resistor - 1%"
R20 R21 R22 R24 R25 R26: library part R0603_3K3_1%_0.1W_100PPM, "Resistor - 1%"
RP1A RP1B RP1C RP1D RP1E RP1F: library part RES_ARRAY_1206, "Resistor network 1206 (4x0402) Maritex RAC4Xxxx"
T1A T1B T1C T1D T1E T1F: "NPN Transistor"

## Free pads (board coordinates)
  round 255.91 hole 137.8: MOUNT(2903,369) MOUNT(4262.73,3384.66) MOUNT(7542,3384) MOUNT(11089.82,368.76) MOUNT(11089.82,3386.63)
  round 196.85 hole 125.98: ""(344.49,728.35) ""(344.49,5807.09) ""(2864.17,728.35) ""(2864.17,5807.09)

## Via types
v1: diameter 26, hole 12, Top Layer to Bottom Layer, tented both sides, 501 vias

## Nets (pads, with @x,y where several pads share a name; then routed paths per layer and width w, separated by ;. In a path a pad name is that pad's centre, name@x,y a point inside that pad or via, vN(x,y) a via of type N, cw(c..) or ccw(c..) an arc to the next point about the centre after c; other vN are vias at no path point)
+2V5: CN1A.7 CN1B.7 CN1C.7 CN1D.7 CN1E.7 CN1F.7 J1.81 RP1A.1 RP1A.2 RP1A.3 RP1A.4 RP1B.1 RP1B.2 RP1B.3 RP1B.4 RP1C.1 RP1C.2 RP1C.3 RP1C.4 RP1D.1 RP1D.2 RP1D.3 RP1D.4 RP1E.1 RP1E.2 RP1E.3 RP1E.4 RP1F.1 RP1F.2 RP1F.3 RP1F.4 | length 15572.7
  Top Layer w12: J1.81@2898.23,3269.84 3149.16,3269.84 3266,3153 5256,3153 v1(5574,2835) ; CN1A.7@3586.83,1248.02 3586.83,1097 3634.83,1049 3920,1049 ; RP1A.1@3869,1765 3915,1765 3920,1760 ; RP1A.2@3869,1796.5 3918.5,1796.5 3920,1795 ; RP1A.3@3869,1827.99 3917.01,1827.99 3920,1825 ; RP1A.4@3869,1859.49 3905.51,1859.49 3920,1845 3920,1825 ; 3920,1170 3920,1177 ; CN1B.7@4409.83,1248.02 4409.83,1050.17 4411,1049 ; RP1B.1@4692,1765 4738,1765 4743,1760 ; RP1B.2@4692,1796.5 4741.5,1796.5 4743,1795 ; RP1B.3@4692,1827.99 4740.01,1827.99 4743,1825 ; RP1B.4@4692,1859.49 4728.51,1859.49 4743,1845 4743,1825 ; CN1C.7@5233.83,1249.02 5233.83,1049.17 5234,1049 ; RP1C.1@5516,1766 5562,1766 5567,1761 ; RP1C.2@5516,1797.5 5565.5,1797.5 5567,1796 ; RP1C.3@5516,1828.99 5564.01,1828.99 ; RP1C.4@5516,1860.49 5532.51,1860.49 5566.49,1860.49 5567,1861 5567,1852 ; v1(5643,2532) 5643,2405 5569.21,2331.21 5569.21,1854.21 5567,1852 ; CN1D.7@6056.83,1249.02 6056.83,1049.17 6057,1049 ; RP1D.1@6339,1766 6385,1766 6390,1761 ; RP1D.2@6339,1797.5 6388.5,1797.5 6390,1796 ; RP1D.3@6339,1828.99 6387.01,1828.99 6390,1826 ; RP1D.4@6339,1860.49 6375.51,1860.49 6390,1846 6390,1826 ; CN1E.7@6879.83,1249.02 6879.83,1050.83 6878,1049 ; RP1E.1@7162,1766 7208,1766 7213,1761 ; RP1E.2@7162,1797.5 7211.5,1797.5 7213,1796 ; RP1E.3@7162,1828.99 7210.01,1828.99 7213,1826 ; RP1E.4@7162,1860.49 7198.51,1860.49 7213,1846 7213,1826 ; CN1F.7@7702.83,1249.02 7702.83,1049.83 7702,1049 ; RP1F.1@7985,1766 8031,1766 8036,1761 ; RP1F.2@7985,1797.5 8034.5,1797.5 8036,1796 ; RP1F.3@7985,1828.99 8033.01,1828.99 8036,1826 ; RP1F.4@7985,1860.49 8021.51,1860.49 8036,1846 8036,1826 ; 3920,1049 4411,1049 ; 3920,1049 3920,1177 ; 3920,1177 3920,1760 ; 3920,1760 3920,1795 ; 3920,1795 3920,1825 ; 4411,1049 4745,1049 ; 4743,1760 4743,1051 4745,1049 ; 4743,1760 4743,1795 ; 4743,1795 4743,1825 ; 4745,1049 5234,1049 ; 5234,1049 5567,1049 ; 5567,1049 6057,1049 ; 5567,1049 5567,1761 ; 5567,1761 5567,1796 ; 5567,1796 5567,1852 ; 6057,1049 6392,1049 ; 6390,1761 6390,1051 6392,1049 ; 6390,1761 6390,1796 ; 6390,1796 6390,1826 ; 6392,1049 6878,1049 ; 6878,1049 7215,1049 ; 7213,1761 7213,1051 7215,1049 ; 7213,1761 7213,1796 ; 7213,1796 7213,1826 ; 7215,1049 7702,1049 ; 7702,1049 7993,1049 8036,1092 8036,1761 ; 8036,1761 8036,1796 ; 8036,1796 8036,1826
  Bottom Layer w12: v1(5574,2835) 5643,2766 v1(5643,2532)
+3V3: C5A.2 C5B.2 C5C.2 C5D.2 C5E.2 C5F.2 C6A.2 C6B.2 C6C.2 C6D.2 C6E.2 C6F.2 C10.1 C13.1 C15.1 IC1.6 IC3.6 IC3.7 IC5.6 IC5.7 L1A.2 L1B.2 L1C.2 L1D.2 L1E.2 L1F.2 L2A.2 L2B.2 L2C.2 L2D.2 L2E.2 L2F.2 R17A.2 R17B.2 R17C.2 R17D.2 R17E.2 R17F.2 R20.2 R21.1 R24.2 R25.1 | length 2100.2
  Top Layer w10: v1(3475,1940) 3478,1937 L1A.2@3478,1898.37 ; v1@3550,1945 L2A.2@3550,1899.37 3594.37,1899.37 v1(3595,1900) ; 3602,2029 3639.5,2066.5 C6A.2@3667,2066.5 ; v1(3666,2379) 3666.5,2378.5 R17A.2@3712,2378.5 ; v1(4298,1940) 4301,1937 L1B.2@4301,1898.37 ; v1@4373,1945 L2B.2@4373,1899.37 4417.37,1899.37 v1(4418,1900) ; 4425,2029 4462.5,2066.5 C6B.2@4490,2066.5 ; v1(4489,2379) 4489.5,2378.5 R17B.2@4535,2378.5 ; v1(5122,1941) 5125,1938 L1C.2@5125,1899.37 ; v1@5197,1946 L2C.2@5197,1900.37 5241.37,1900.37 v1(5242,1901) ; 5249,2030 5286.5,2067.5 C6C.2@5314,2067.5 ; v1(5313,2380) 5313.5,2379.5 R17C.2@5359,2379.5 ; v1(5945,1941) 5948,1938 L1D.2@5948,1899.37 ; v1@6020,1946 L2D.2@6020,1900.37 6064.37,1900.37 v1(6065,1901) ; 6072,2030 6109.5,2067.5 C6D.2@6137,2067.5 ; v1(6136,2380) 6136.5,2379.5 R17D.2@6182,2379.5 ; v1(6768,1941) 6771,1938 L1E.2@6771,1899.37 ; v1@6843,1946 L2E.2@6843,1900.37 6887.37,1900.37 v1(6888,1901) ; 6895,2030 6932.5,2067.5 C6E.2@6960,2067.5 ; v1(6959,2380) 6959.5,2379.5 R17E.2@7005,2379.5 ; v1(7591,1941) 7594,1938 L1F.2@7594,1899.37 ; v1@7666,1946 L2F.2@7666,1900.37 7710.37,1900.37 v1(7711,1901) ; 7718,2030 7755.5,2067.5 C6F.2@7783,2067.5 ; v1(7782,2380) 7782.5,2379.5 R17F.2@7828,2379.5 ; v1(9833,554) 9833.5,553.5 R25.1@9833.5,511 ; v1(10106,510) C13.1@10143.5,510 C13.1@10130.06,523.45 ; IC5.6@10110.37,579.51 10110.37,543.13 C13.1@10130.06,523.45 ; IC5.7@10130.06,579.51 C13.1@10130.06,523.45 ; R24.2@10271,699.5 v1(10271,735) ; R21.1@10418.5,449 10418.5,489.5 v1(10419,490) ; IC3.6@10660.37,562.51 10660.37,512.63 10664,509 10680,509 10680.06,508.94 ; IC3.7@10680.06,562.51 10680.06,508.94 ; C15.1@10746,498.5 10742.5,502 v1(10707,502) 10687,502 10680.06,508.94 ; R20.2@10834,679.5 v1(10834,725)
  other v1: 3550,1940 4373,1940 5197,1941 6020,1941 6843,1941 7666,1941 3590,1985
+5V: C12.1 IC2.6 J2.81 J2.82 J2.83 J2.84 J2.85 J2.86 J2.87 J2.88 J2.90 J2.92 J2.94 J2.96 | length 1708.4
  Top Layer w12: v1(239,4694) 245.63,4700.63 J2.81@304.53,4700.63 373.37,4700.63 v1(375,4699) ; v1(239,4764) 250.59,4775.59 J2.85@304.53,4775.59 362.41,4775.59 v1(374,4764) ; v1(239,4800) 239.79,4800.79 J2.87@304.53,4800.79 372.21,4800.79 v1(373,4800) ; v1(240,4729) 243.17,4725.83 J2.83@304.53,4725.83 368.83,4725.83 v1(374,4731) ; v1(458,4700) 458.63,4700.63 J2.82@530.12,4700.63 589.37,4700.63 v1(597,4693) ; v1(460,4735) 469.17,4725.83 J2.84@530.12,4725.83 597.83,4725.83 v1(599,4727) ; v1(460,4776) 460.41,4775.59 J2.86@530.12,4775.59 593.41,4775.59 v1(600,4769) ; v1(460,4810) 469.21,4800.79 J2.88@530.12,4800.79 596.79,4800.79 v1(602,4806) ; v1(461,4850) 461.55,4850.55 J2.90@530.12,4850.55 597.45,4850.55 v1(603,4845) ; v1(462,4882) 468.25,4875.75 J2.92@530.12,4875.75 596.75,4875.75 v1(602,4881) ; v1(462,4920) 467.51,4925.51 J2.94@530.12,4925.51 602.49,4925.51 v1(603,4925) ; v1(462,4949) 463.71,4950.71 J2.96@530.12,4950.71 596.71,4950.71 v1(602,4956)
+12V_PSU: C9.1 C11.1 D1.1 IC1.3 IC2.3 J3.1 J4.1 | length 1012.4
  Top Layer w6: v1(10360,2940) 10360,2880 10370,2870 10370,2840 10360,2830 10360,2780 v1(10360,2740) v1(10440,2740) 10450,2730 v1(10520,2730) 10520,2780 10520,2840 10520,2900 v1(10520,2940) v1(10440,2940)
  Top Layer w40: v1@10370,2840 v1@10520,2840 ; v1(10440,2740) v1(10440,2940)
  other v1: 10520,2782.5 10360,2790 10520,2835 10360,2840 10520,2887.5 10360,2890
DBGU_RXD: P2.5 R22.1 R23.1 | length 3183
  Top Layer w6: P2.5@8458,2715 8544.5,2628.5 8544.5,1897.5 ; 8549,1893 8544.5,1897.5 ; R23.1@10447,883.5 10381,883.5 R22.1@10380,882.5 10333.01,882.5 10248.5,967 9946,967 9538,1375 9067,1375 9027.5,1414.5 8544.5,1897.5
DBGU_TXD: IC3.25 P2.3 | length 3604.1
  Top Layer w6: P2.3@8458,2815 8513,2760 8608,2760 8665,2703 8665,1980 9228,1417 9557,1417 9977,997 10418,997 10496,919 10496,868 ; 10496,876 10496,868 ; IC3.25@10526.51,657 10460,657 10453,664 10453,717 10496,760 10496,868
DETECTA: CN1A.6 J2.69 RP1A.6 | length 7383.1
  Top Layer w6: J2.69@304.53,4475.75 158.75,4475.75 73,4390 73,2556.03 351.03,2278 1008,2278 1031,2255 1316.11,2255 1343.11,2282 1413,2282 ; 1405,2282 1413,2282 ; CN1A.6@3555.33,1248.02 3555.33,1311.33 v1(3556,1312) ; RP1A.6@3799,1827.99 3796.99,1830 v1(3745,1830) 3745,1892 3763,1910 3763,2132.94 3613.94,2282 1413,2282
  Bottom Layer w6: v1(3556,1312) 3595,1351 3877,1351 3899,1373 3899,1792 3861,1830 v1(3745,1830)
DETECTB: CN1B.6 J2.65 RP1B.6 | length 8171.1
  Top Layer w6: v1(218,4401) 304.31,4401 J2.65@304.53,4400.79 ; v1(361,2340) 1014,2340 1059,2295 1145.11,2295 1211.11,2361 3506.91,2361 3595.91,2450 3991.94,2450 4152.94,2289 4430.78,2289 4586,2133.78 4586,1910 4568,1892 v1(4568,1830) 4619.99,1830 RP1B.6@4622,1827.99 ; CN1B.6@4378.33,1248.02 4378.33,1311.33 v1(4379,1312)
  Bottom Layer w6: v1(218,4401) 69,4252 69,2607 336,2340 v1(361,2340) ; v1(4379,1312) 4418,1351 4700,1351 4722,1373 4722,1792 4684,1830 v1(4568,1830)
DETECTC: CN1C.6 J2.45 RP1C.6 | length 8391.4
  Top Layer w6: v1(187,3839) 303.8,3839 J2.45@304.53,3838.27 ; v1(402,2414) 869,2414 885,2398 1084.89,2398 1123.89,2437 1237,2437 ; 1217,2437 1237,2437 ; CN1C.6@5202.33,1249.02 5202.33,1312.33 v1(5203,1313) ; RP1C.6@5446,1828.99 5443.99,1831 v1(5392,1831) 5392,1893 5410,1911 5410,2133.94 5256.94,2287 5070.09,2287 4829.09,2528 3561.06,2528 3470.06,2437 1237,2437
  Bottom Layer w6: v1(187,3839) 147.89,3839 105,3796.11 105,2659.03 350.03,2414 v1(402,2414) ; v1(5203,1313) 5242,1352 5524,1352 5546,1374 5546,1793 5508,1831 v1(5392,1831)
DETECTD: CN1D.6 J2.41 RP1D.6 | length 9036.5
  Top Layer w6: v1(214,3765) 302.83,3765 J2.41@304.53,3763.31 ; v1(367,2492) 949,2492 957,2500 1034,2500 1047,2513 1231,2513 ; 1225,2513 1231,2513 ; CN1D.6@6025.33,1249.02 6025.33,1312.33 v1(6026,1313) ; RP1D.6@6269,1828.99 6266.99,1831 v1(6215,1831) 6215,1893 6233,1911 6233,2133.94 6083.94,2283 5981.94,2283 5661.94,2603 3525.06,2603 3435.06,2513 1231,2513
  Bottom Layer w6: v1(214,3765) 159,3765 141,3747 141,3683 141,2688.18 337.18,2492 v1(367,2492) ; v1(6026,1313) 6065,1352 6347,1352 6369,1374 6369,1793 6331,1831 v1(6215,1831)